# Altium PCB DC_DC.PcbDoc
Units mil, origin at the board's own origin, x right, y up, seen from the top; angles counter-clockwise.
Board outline 1775 x 1405 mil, 4 copper layers (Top Layer, Layer 1, Layer 2, Bottom Layer), stack 60.866 mil thick; 41 components, 25 nets, 139 pads, 146 vias.
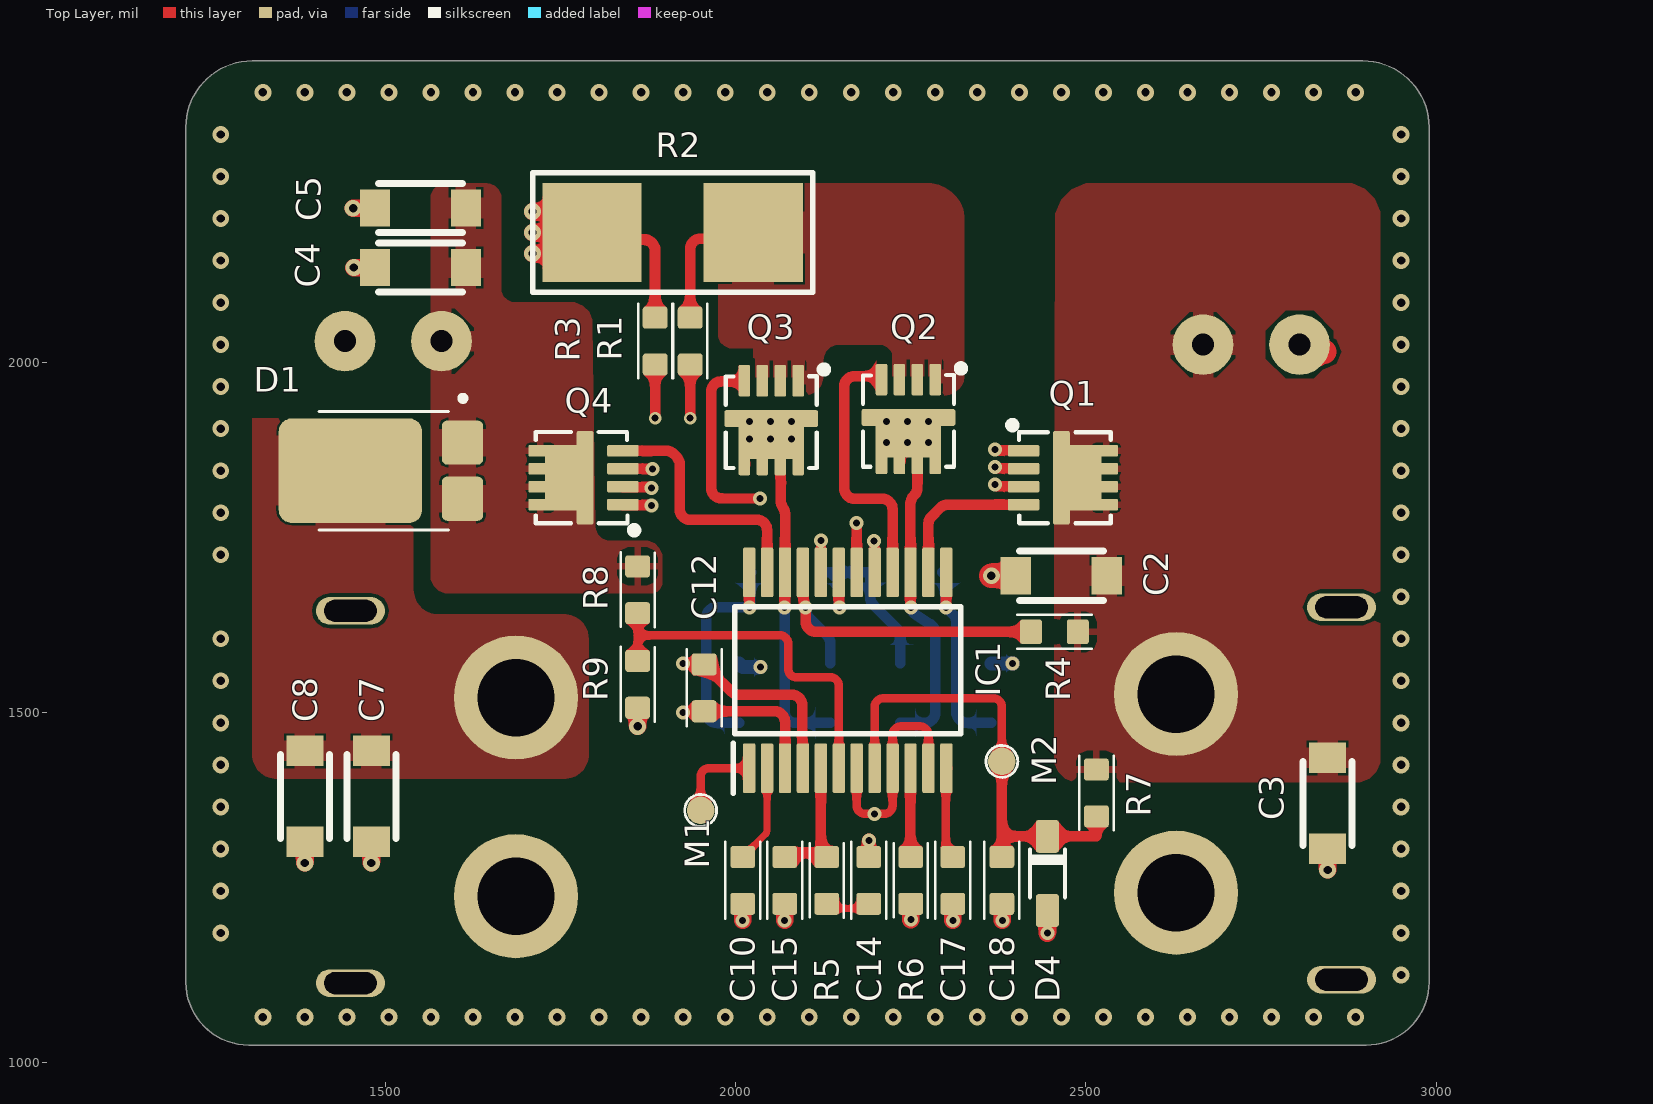
[diagram p0: Top Layer view]
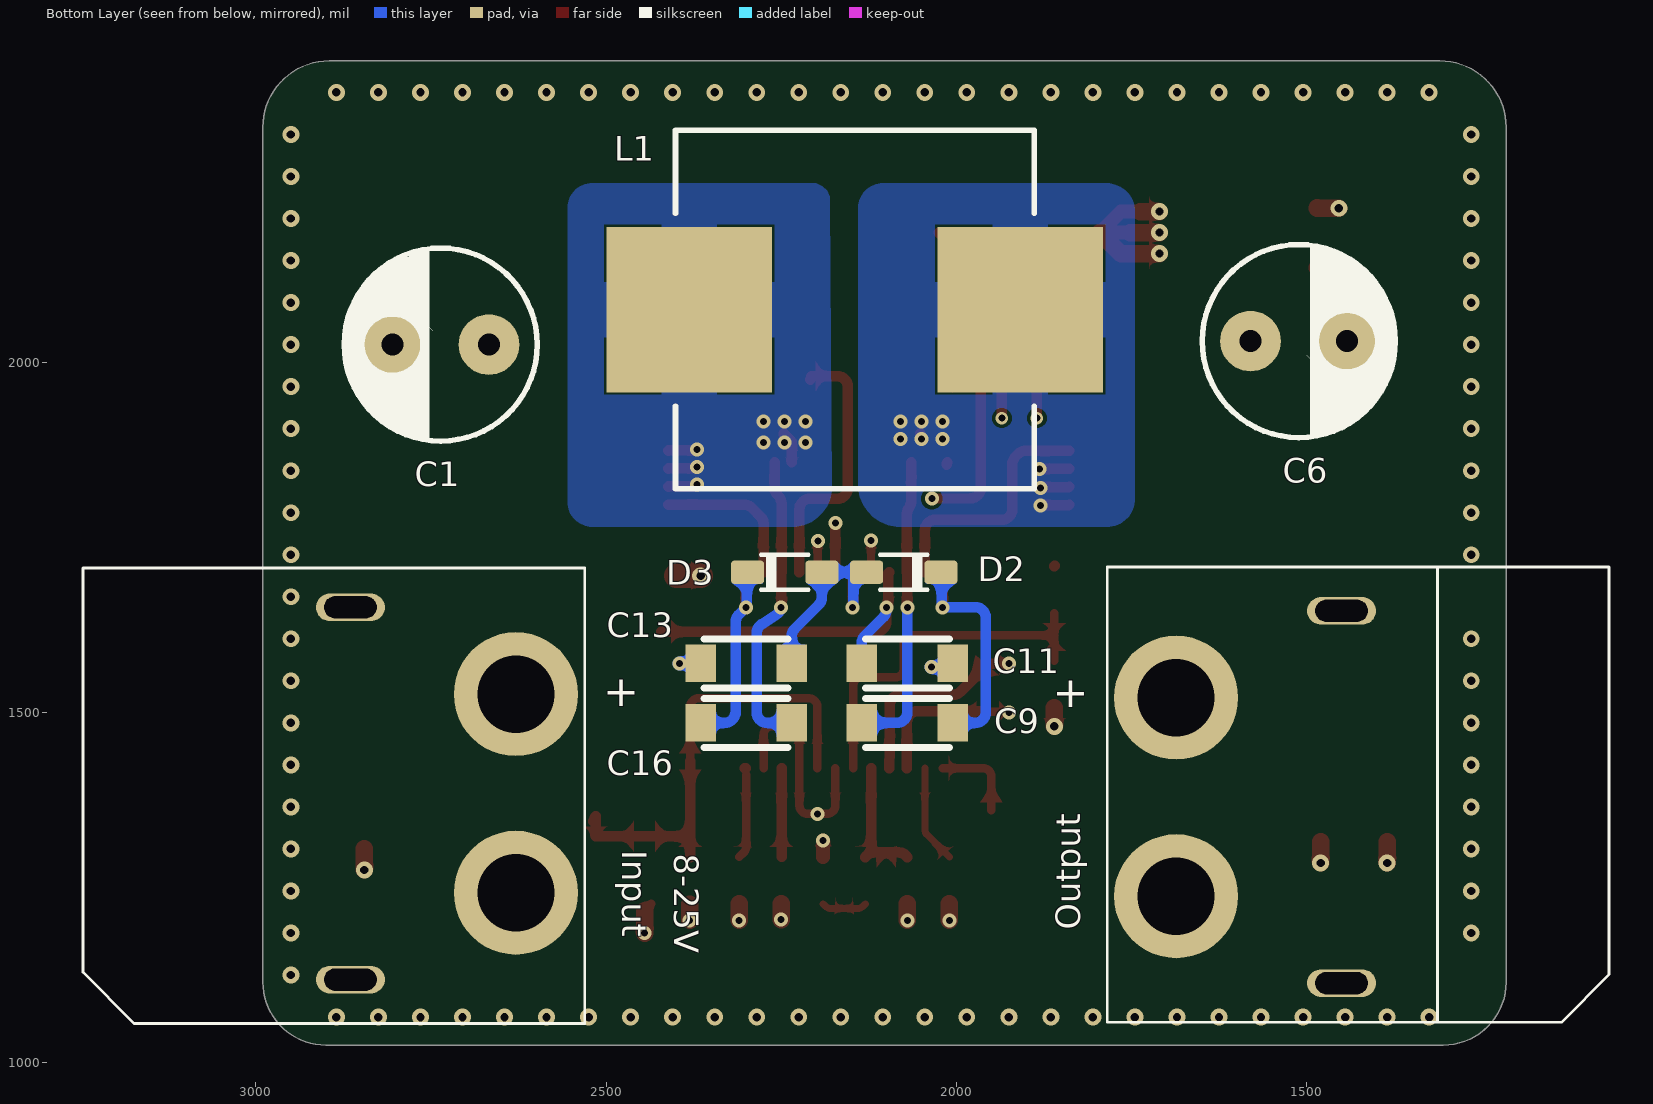
[diagram p1: Bottom Layer view, seen from below]
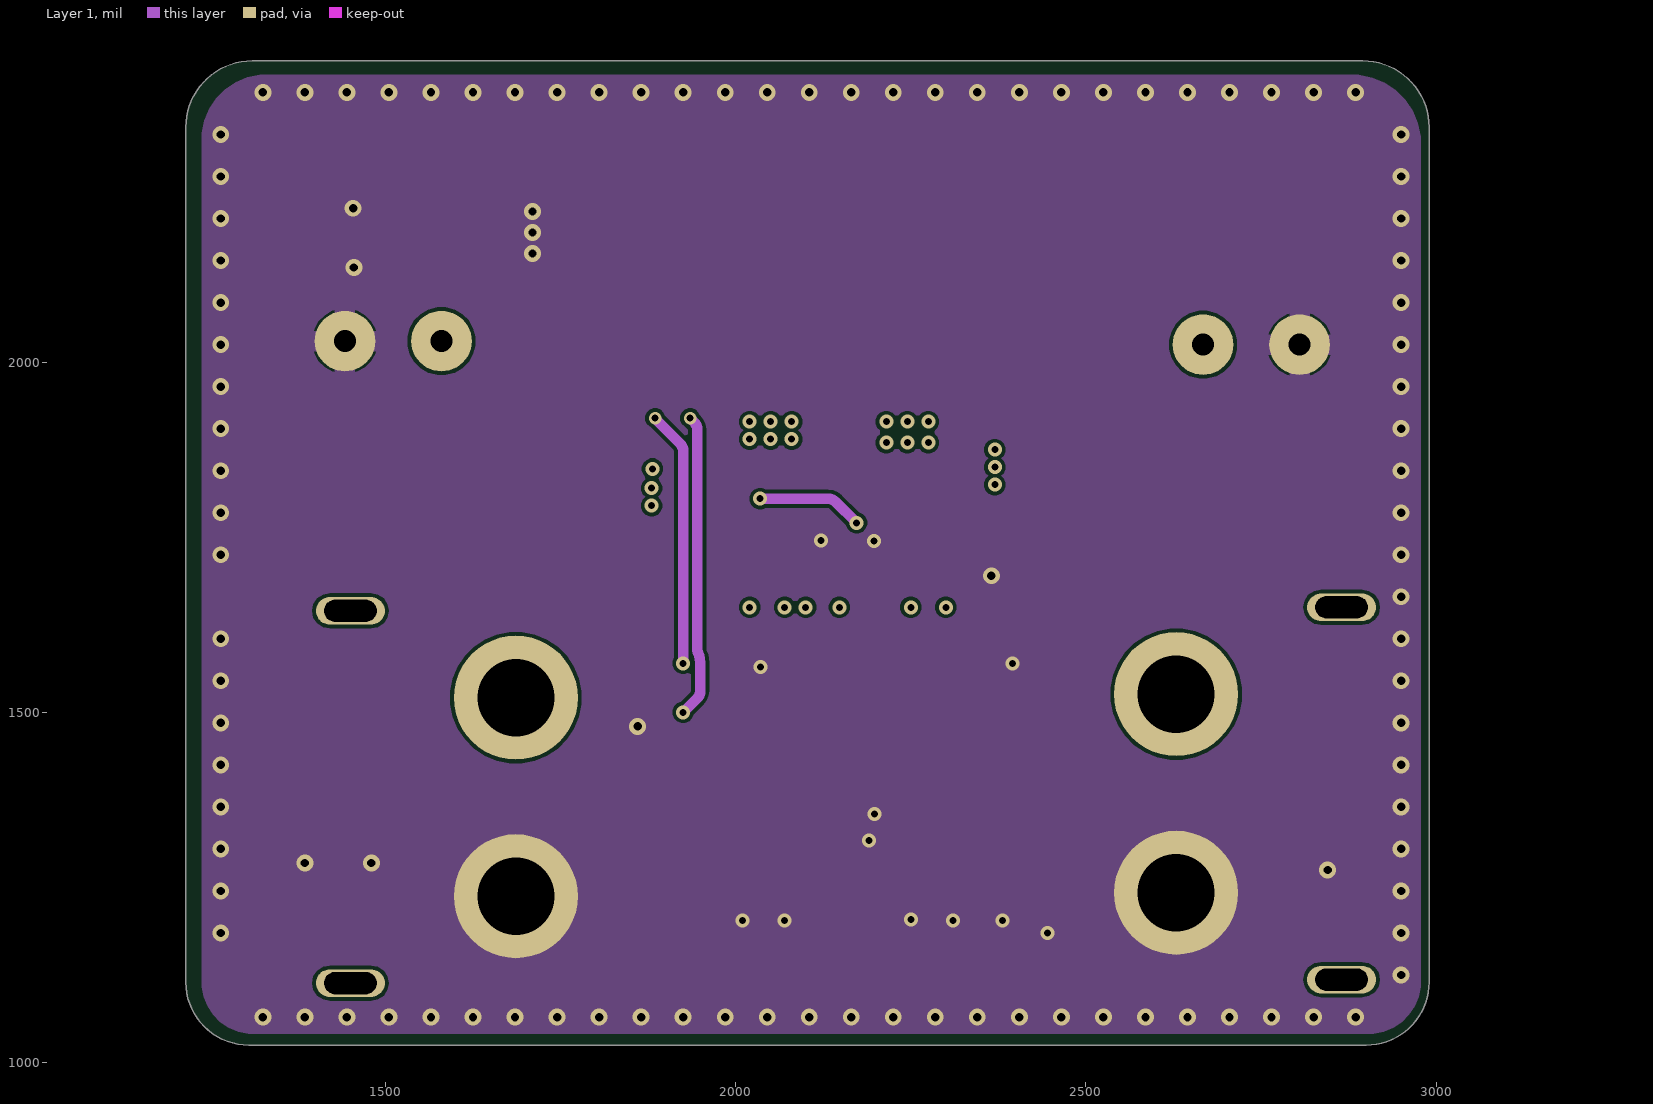
[diagram p2: Layer 1]
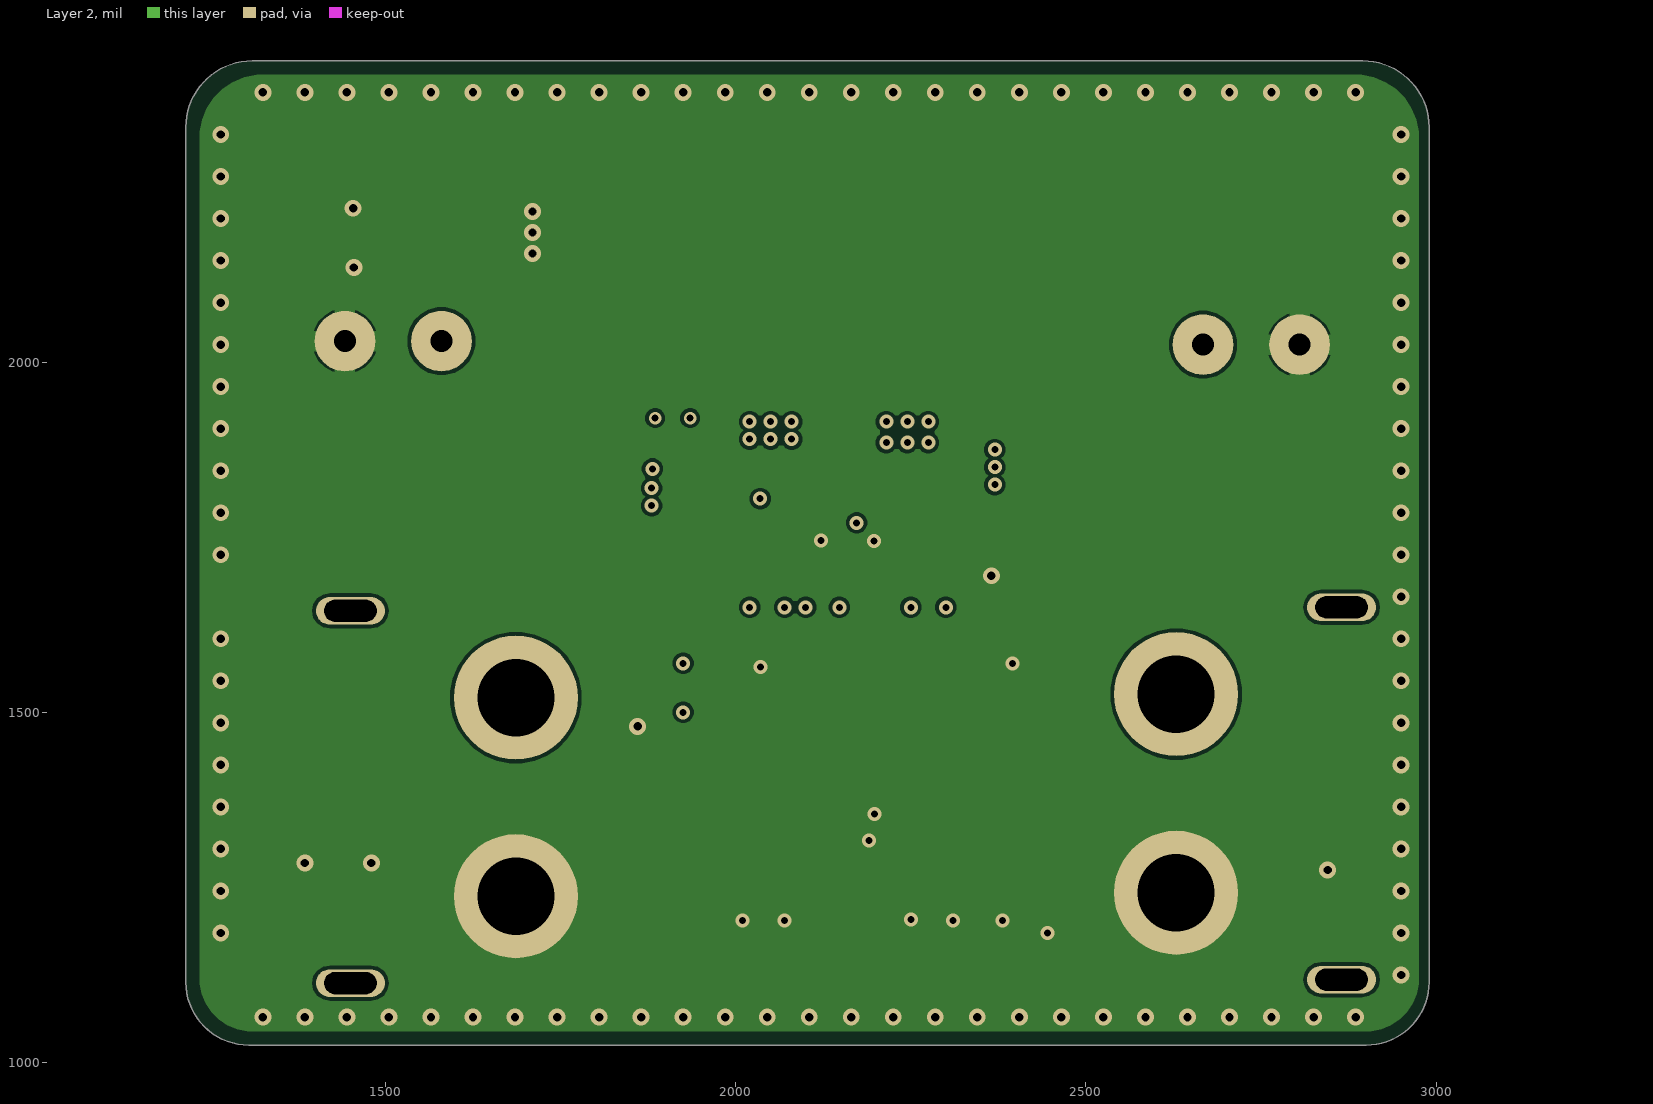
[diagram p3: Layer 2]

## Layer stack, top to bottom
Top Solder: solder mask 0.4, Solder Resist, Dk 3.7
Top Layer: signal copper 1.378
Dielectric 4: prepreg 2.7165, PP-006, Dk 4.3
Dielectric 6: prepreg 2.7165, PP-006, Dk 4.3
Layer 1: signal copper 1.378
Dielectric 1: core 44.4882, FR-4, Dk 4.6
Layer 2: signal copper 1.378
Dielectric 7: prepreg 2.7165, PP-006, Dk 4.3
Dielectric 5: prepreg 2.7165, PP-006, Dk 4.3
Bottom Layer: signal copper 1.378
Bottom Solder: solder mask 0.4, Solder Resist, Dk 3.7

## Board outline
1305,1025 2900,1025 ccw(c2900,1115) 2990,1115 2990,2335 ccw(c2895,2335) 2895,2430 1310,2430 ccw(c1310,2335) 1215,2335 1215,1115 ccw(c1305,1115)

## Design rules (kind name [scope] priority, off if disabled: settings)
Clearance [All] p1: gap=4.92 ignorepadtopadclearanceinfootprint=FALSE
HoleSize [All] p1: absolutevalues=TRUE maxlimit=200 minlimit=7.87 maxpercent=80.000 minpercent=20.000
MinimumSolderMaskSliver [All] p1: minsoldermaskwidth=3
PolygonConnect [All] p1: connectstyle=Relief reliefconductorwidth=10 reliefentries=4 polygonreliefangle="90 Angle" airgapwidth=10
RoutingVias [All] p1: holewidth=28 width=50 viastyle="Through Hole" minholewidth=28 minwidth=50 maxholewidth=28 maxwidth=50
SilkToSolderMaskClearance [IsPad] p1: minsilkscreentomaskgap=3 clearancetoexposedcopper=TRUE
SolderMaskExpansion [All] p1: expansion=2 istentingtop=FALSE
Width [All] p1: maxlimit=70 minlimit=8 preferedwidth=12
27 further rules are at their usual default settings.

## Components (designator, comment, footprint, x,y, rotation, side; value= is the part's Value field where it differs from the comment)
C1 "35PZE150M8X9" PZF8x9 2667.2,2025 r0 bottom value=150uF/35V
C2 "C1206C105K5RACTU" C1206_medium 2465,1695 r0 top value=1u
C3 "C1206C105K5RACTU" C1206_medium 2845,1370 r90 top value=1u
C4 "C1206C105K5RACTU" C1206_medium 1550,2135 r0 top value=1u
C5 "C1206C105K5RACTU" C1206_medium 1550,2220 r0 top value=1u
C6 "25PZF220M8X9" PZF8x9 1580,2030 r180 bottom value=220uF/25V
C7 "C1206C105K5RACTU" C1206_medium 1480,1380 r90 top value=1u
C8 "C1206C105K5RACTU" C1206_medium 1385,1380 r90 top value=1u
C9 "C1206C224J1RACAUTO" C1206_thin 2070,1485 r0 bottom value=220n
C10 "AC0603KRX7R9BB223" C0603 2010,1260 r90 top value="22n NP0"
C11 "GRT31C5C2A104JA12L" C1206_thin 2070,1570 r180 bottom value=100n
C12 "GCM1885C2A470JA16J" C0603 1955,1535 r270 top value="47p NP0"
C13 "GRM31CC72A475ME11L" C1206_thick 2300,1570 r0 bottom value=4.7uF
C14 "C0603X103K1RAC3316" C0603 2190,1260 r270 top value=10n
C15 "GCM1885C2A470JA16J" C0603 2070,1260 r90 top value="47p NP0"
C16 "C1206C224J1RACAUTO" C1206_thin 2300,1485 r180 bottom value=220n
C17 "C0603X103K1RAC3316" C0603 2310,1260 r270 top value=10n
C18 "GCM1885C2A470JA16J" C0603 2380,1260 r90 top value="47p NP0"
D1 "PMEG045V100EIPE-QZ" SOT1289 1490,1850 r270 top value=PMEG045V100E
D2 "NRVB0540T1G" SOD323 2075,1700 r180 bottom
D3 "NRVB0540T1G" SOD323 2245,1700 r0 bottom
D4 "PDZ3.6B,115" SOD323 2445,1270 r90 top value=3V6
IC1 "LTC3780IG#PBF" SOP65P780X200-24N 2160,1560 r90 top
Input "XT60-PCB-M" XT60-PCB-M 2628.78,1525.98 r180 bottom (schematic designator Input1)
L1 "7443551470" WE-HCI 2145,2075 r0 bottom value="4.7uH 13A"
M1 "TP" "Pad 1mm SMD" 1950,1360 r0 top
M2 "TP" "Pad 1mm SMD" 2380,1430 r0 top
Output "XT60-PCB-F" XT60-PCB-F 1686.22,1237.52 r0 bottom (schematic designator Output1)
Q1 "FDMC86102L" PowerPak1212_LFPAK33 2470,1835 r270 top
Q2 "FDMC86102L" PowerPak1212_LFPAK33 2246.6,1916 r180 top
Q3 "FDMC86102L" PowerPak1212_LFPAK33 2050.85,1914.45 r180 top
Q4 "FDMC86102L" PowerPak1212_LFPAK33 1780,1835 r90 top
R1 "CR0603-FX-10R0ELF" R0603 1935,2030 r270 top value=10R
R2 "GMR100HTBFMR033" Shunt_2512 1910,2185 r0 top value=0R033
R3 "CR0603-FX-10R0ELF" R0603 1885,2030 r270 top value=10R
R4 "CR0603-FX-10R0ELF" R0603 2455,1615 r180 top value=10R
R5 "RC0603FR-07100KL" R0603 2130,1260 r270 top value=100k
R6 "CRGP0603F10K" R0603 2250,1260 r270 top value=10K
R7 "CRGCQ0603F180K" R0603 2515,1385 r270 top value=180K
R8 "RC0603FR-07100KL" R0603 1860,1675 r270 top value=100k
R9 "CRGCQ0603F6K8" R0603 1860,1540 r270 top value=6K8

## Footprints (in the part's own frame and the unit in brackets; to place one, negate y for a bottom-side part, rotate by r counter-clockwise, add the part's x,y. Pads: shape width x height; smd on the part's side, far side on the other; paste and mask are expansions set on the pad)
C0603 [mm]
  rrect25% 0.8x0.9 smd: 1(-0.85,0) 2(0.85,0)
  silkscreen extent -1.4,-0.64 1.4,0.64, body extent -0.8,-0.4 0.8,0.4, height 0.6
C1206_medium [mm]
  rect 1.1x1.35 smd: 1(-1.65,0) 2(1.65,0)
  silkscreen extent -1.52,-0.89 1.52,0.89, body extent -1.6,-0.8 1.6,0.8, height 1.26
C1206_thick [mm]
  rect 1.1x1.35 smd: 1(-1.65,0) 2(1.65,0)
  silkscreen extent -1.52,-0.89 1.52,0.89, body extent -1.6,-0.85 1.6,0.85, height 1.77
C1206_thin [mm]
  rect 1.1x1.35 smd: 1(-1.65,0) 2(1.65,0)
  silkscreen extent -1.52,-0.89 1.52,0.89, body extent -1.7,-0.91 1.7,0.89, height 1.01
"Pad 1mm SMD" [mm]
  round 1 smd mask+0.051: 1(0,0)
  silkscreen extent -0.58,-0.58 0.58,0.58
PowerPak1212_LFPAK33 [mil]
  rrect25% 16.5x45 smd mask+2: 1(-38.4,-59) 2(-12.8,-59) 3(12.8,-59) 4(38.4,-59)
  rrect25% 16.5x34 smd mask+2: 5(-38.4,59) 5(-12.8,59) 5(12.8,59) 5(38.4,59)
  rrect25% 134x24 smd mask+2: 5(0,-5)
  rrect25% 93.31x69.29 smd mask+2: 5(0.01,17.78)
  silkscreen extent -77,-77 65,65, body extent -65,-65 65,65, height 44
PZF8x9 [mm]
  round 2.2 hole 0.8: 1(0,0) 2(3.5,0)
  silkscreen extent -1.75,-3.5 5.25,3.5, body extent -2.22,-4 5.78,4, height 9.01
R0603 [mm]
  rrect25% 0.8x0.9 smd: 1(-0.85,0) 2(0.85,0)
  silkscreen extent -1.36,-0.62 1.35,0.62, body extent -0.8,-0.4 0.8,0.4, height 0.4
Shunt_2512 [mm]
  rect 3.6x3.6 smd: 1(-2.921,0) 2(2.921,0)
  silkscreen extent -5.08,-2.16 5.08,2.16, body extent -3.09,-1.57 3.21,1.63, height 0.66
SOD323 [mil]
  rrect25% 47x33 smd paste+0 mask+2: 1(-53,0) 2(53,0)
  silkscreen extent -34,-25 34,25, body extent -53,-25 53,25, height 43
SOP65P780X200-24N [mm]
  rrect25% 1.8x0.45 smd mask+0.051: 1(-3.55,3.575) 2(-3.55,2.925) 3(-3.55,2.275) 4(-3.55,1.625) 5(-3.55,0.975) 6(-3.55,0.325) 7(-3.55,-0.325) 8(-3.55,-0.975) 9(-3.55,-1.625) 10(-3.55,-2.275) 11(-3.55,-2.925) 12(-3.55,-3.575) 13(3.55,-3.575) 14(3.55,-2.925) 15(3.55,-2.275) 16(3.55,-1.625) 17(3.55,-0.975) 18(3.55,-0.325) 19(3.55,0.325) 20(3.55,0.975) 21(3.55,1.625) 22(3.55,2.275) 23(3.55,2.925) 24(3.55,3.575)
  silkscreen extent -4.45,-4.1 2.3,4.15, body extent -3.9,-4.1 3.9,4.1, height 2
SOT1289 [mil]
  rrect25% 62.99x59.06 smd: 1(-35,120) 2(45,120)
  rrect25% 149.61x204.72 smd: 3(5,-40)
  silkscreen extent -102,-85 90,125, body extent -83,-121 93,135, height 30
WE-HCI [mm] "Würth Elektronik - Fixed Inductors"
  rect 6x6 smd: 1(-6,0) 2(6,0)
  silkscreen extent -6.5,-6.5 6.5,6.5, body extent -7.04,-6.79 6.96,6.52, height 6.55
XT60-PCB-F [mm]
  round 4.5 hole 2.8: 1(0,-7.2) 2(0,0)
  oval 2.5x1 hole 0.8 slot 1.9 at 0 deg: 3(-6,-10.35) 4(-6,3.15)
  silkscreen extent -15.7,-11.94 2.5,4.57, body extent -16.31,-11.18 2.09,4.32, height 8.11
XT60-PCB-M [mm]
  round 4.5 hole 2.8: 1(0,0) 2(0,-7.2)
  oval 2.5x1 hole 0.8 slot 1.9 at 0 deg: 3(-6,-10.35) 4(-6,3.15)
  silkscreen extent -15.7,-11.94 2.5,4.57, body extent -15.2,-11.31 3,4.19, height 8.41

## Part data
C1: library part EC_THT_157_polarised, "High temp hybrid capacitor -55/125C", Supplier Part Number 1=232-35PZE150M8X9, Category="Capacitors THT", Component Type=Capacitors, Main=Capacitors, SMD/THD=THT, Status=A, Supplier 1=Mouser, Supplier 2=Digi-Key, Supplier Part Number 2=35PZE150M8X9-ND
C2 C3 C4 C5 C7 C8: library part CC_1206_X7R_105, "Ceramic Capacitor X7R 50V", Supplier Part Number 1=81-GCJ31MR71H105KA2L, Supplier 1=Mouser, Supplier 2=Digi-Key, Supplier 3=Farnell, Supplier Part Number 2=490-5810-1-ND, Supplier Part Number 3=2781416
C6: library part EC_THT_227_polarised, "High temp hybrid capacitor -55/125C", Supplier Part Number 1=232-25PZF220M8X9, Category="Capacitors THT", Component Type=Capacitors, Main=Capacitors, SMD/THD=THT, Status=A, Supplier 1=Mouser, Supplier 2=Digi-Key, Supplier Part Number 2=25PZF220M8X9-ND
C9 C16: library part CC_1206_X7R_224, "Ceramic Capacitor X7R 100V", Supplier Part Number 1=80-C1206C224J1RAUTO, Supplier 1=Mouser, Supplier 2=Digi-Key, Supplier Part Number 2=399-C1206C224J1RACAUTOCT-ND
C10: library part CC_0603_X7R_223, "Ceramic Capacitor NP0 50V", Manufacturer Part Number="22n/50V X7R C0603", Supplier Part Number 1=603-AC603KRX7R9BB223, Category="Capacitors CERA SMD", Component Type=Capacitors, Main=Capacitors, Part Number="22n/50V X7R C0603", SMD/THD=SMD, Status=A, Supplier 1=Mouser, Supplier 2=Farnell, Supplier 3=Digi-Key, Supplier Part Number 2=3368998, Supplier Part Number 3=311-3119-6-ND
C11: library part CC_1206_NP0_104, "Ceramic Capacitor NP0 100V", Supplier Part Number 1=81-GRT31C5C2A104JA2L, Supplier 1=Mouser, Supplier 2=Digi-Key, Supplier Part Number 2=490-GRT31C5C2A104JA12LDKR-ND
C12 C15 C18: library part CC_0603_NP0_470, "Ceramic Capacitor NP0 100V", Supplier Part Number 1=81-GCM1885C2A470JA6J, Category="Capacitors CERA SMD", Component Type=Capacitors, ComponentLink1Description=datasheet, Main=Capacitors, SMD/THD=SMD, Status=A, Supplier 1=Mouser, Supplier 2=Farnell, Supplier Part Number 2=3784365
C13: library part CC_1206_X7S_475, "Ceramic Capacitor X7S 100V", Supplier Part Number 1=81-GRM31CC72A475ME11, Supplier 1=Mouser, Supplier 2=Digi-Key, Supplier Part Number 2=490-18621-6-ND
C14 C17: library part CC_0603_X7R_103, "Ceramic Capacitor X7R 100V", Part Number="10n/100V X7R C0603", Supplier Part Number 1=80-C0603X103K1R3316, Category="Capacitors CERA SMD", Component Type=Capacitors, Main=Capacitors, SMD/THD=SMD, Status=A, Supplier 1=Mouser, Supplier 2=Digi-Key, Supplier 3=Farnell, Supplier 4=TME, Supplier Part Number 2=399-C0603X103K1RAC3316CT-ND, Supplier Part Number 3=2666889, Supplier Part Number 4=C0603X103K1RAC3316
D1: library part PMEG045V100E, "Planar Low VF Schottky barrier rectifier 45V/10A", Manufacturer=NXP, Part Number=PMEG4005AEA, Supplier Part Number 1=771-PMEG4005AESFYL, Category=Schottky, ComponentLink1Description=Datasheet, ComponentLink1URL=http://www.farnell.com/datasheets/684565.pdf, Main=Diodes, SMD/THD=SMD, Status=A, Supplier 1=Mouser, Supplier 2=Digi-Key, Supplier 3=Farnell, Supplier Part Number 2=1727-2295-1-ND, Supplier Part Number 3=2498560
D2 D3: "Schottky Diode 40V, 500mA", Supplier Part Number 1=863-NRVB0540T1G, Category=Schottky, Main=Diodes, SMD/THD=SMD, Status=A, Supplier 1=Mouser, Supplier 2=Farnell, Supplier Part Number 2=2723913
D4: "Zener Diode 3.6V, 400mW", Supplier Part Number 1=771-PDZ36B8115, Category=Zener, Main=Diodes, SMD/THD=SMD, Status=A, Supplier 1=Mouser, Supplier 2=TME, Supplier Part Number 2=PDZ3.6B.115
IC1: "DC/DC Buck-Boost", Manufacturer_Name="Analog Devices", Supplier Part Number 1=584-LTC3780IG#PBF, Height=2mm, Manufacturer_Part_Number=LTC3780IG#PBF, Supplier 1=Mouser, Supplier 2=TME, Supplier Part Number 2=LTC3780IGPBF
Input Output: "XT60 Connector", Manufacturer_Name=Amass, Manufacturer_Part_Number=XT30PB, Datasheet Link=https://www.tme.eu/Document/4acc913878197f8c2e30d4b8cdc47230/XT30UPB%20SPEC.pdf, Height=10.7mm
L1: library part "WE-HCI High Current 4.7uH-13A", "WE-HCI SMT High Current Inductor 4.7uH 20% 100kHz Ferrite 13A SMD T/R  / Frequency - Self Resonant 30MHz", Supplier Part Number 1=732-7443551470CT-ND, Supplier 1=Digikey, Supplier 2=Mouser, Supplier Part Number 2=710-7443551470
M1 M2: library part TP_PCB, "Test Point", Category=Pads_Pins_Measure_Points, Component Type=Mechanical, Main=Mechanical, Stock number=--------
Q1 Q2 Q3 Q4: "Single N-Channel 100V, 18A, 23mOhm", Manufacturer="ON Semiconductor / Fairchild", Supplier Part Number 1=512-FDMC86102L, Category=N-MOS, Component Type=Transistors, ComponentLink1Description=Datasheet, ComponentLink1URL=http://www.farnell.com/datasheets/1837750.pdf, Main=Transistors, Manufacturer Part Number=FDMC86102L, Part Number=FDMC86102L, SMD/THD=SMD, Status=A, Supplier 1=Mouser, Supplier 2=Digi-Key, Supplier Part Number 2=FDMC86102LFSCT-ND
R1 R3 R4: library part CR_0603_100, "Resistor 1%, 0.1W, 75V", Supplier Part Number 1=652-CR0603FX-10R0ELF, Category="Resistors SMD", Component Type=Resistors, Main=Resistors, SMD/THD=SMD, Status=A, Supplier 1=Mouser, Supplier 2=Farnell, Supplier 3=Digi-Key, Supplier Part Number 2=2321756, Supplier Part Number 3=CR0603-FX-10R0ELFDKR-ND
R2: library part SHUNT_2512_0R033, "Current Sense Resistor 1%, 3W, AEC-Q200", Supplier Part Number 1=755-GMR100HTBFMR033, Category="Resistors SMD", Component Type=Resistors, Main=Resistors, SMD/THD=SMD, Status=A, Supplier 1=Mouser, Supplier 2=Digi-Key, Supplier 3=Farnell, Supplier Part Number 2=511-1690-1-ND, Supplier Part Number 3=2808333
R5 R8: library part CR_0603_104, "Resistor 1%, 0.1W, 75V", Supplier Part Number 1=603-RC0603FR-07100KL, Category="Resistors SMD", Component Type=Resistors, Main=Resistors, SMD/THD=SMD, Status=A, Supplier 1=Mouser, Supplier 2=Farnell, Supplier 3=TME, Supplier Part Number 2=9238727, Supplier Part Number 3=RC0603FR-07100K
R6: library part CR_0603_103, "Resistor 1%, 0.1W, 75V", Supplier Part Number 1=279-CRGP0603F10K, Category="Resistors SMD", Component Type=Resistors, Main=Resistors, SMD/THD=SMD, Status=A, Supplier 1=Mouser, Supplier 2=Digi-Key, Supplier 3=Farnell, Supplier Part Number 2=A130428CT-ND, Supplier Part Number 3=2861046
R7: library part CR_0603_184, "Resistor 1%, 0.1W, 75V", Supplier Part Number 1=279-CRGCQ0603F180K, Category="Resistors SMD", Component Type=Resistors, Main=Resistors, SMD/THD=SMD, Status=A, Supplier 1=Mouser, Supplier 2=Digi-Key, Supplier 3=Farnell, Supplier Part Number 2=A129715CT-ND, Supplier Part Number 3=2861488
R9: library part CR_0603_682, "Resistor 1%, 0.1W, 75V", Supplier Part Number 1=279-CRGCQ0603F6K8, Category="Resistors SMD", Component Type=Resistors, Main=Resistors, SMD/THD=SMD, Status=A, Supplier 1=Mouser, Supplier 2=Digi-Key, Supplier 3=Farnell, Supplier Part Number 2=A129698CT-ND, Supplier Part Number 3=2861471

## Via types
v1: diameter 24, hole 12, Top Layer to Bottom Layer, tented both sides, 102 vias
v2: diameter 20, hole 10, Top Layer to Bottom Layer, tented both sides, 40 vias
v3: diameter 24, hole 12, Top Layer to Bottom Layer, tented top, 2 vias
v4: diameter 18, hole 10, Top Layer to Bottom Layer, tented both sides, 2 vias

## Nets (pads, with @x,y where several pads share a name; then routed paths per layer and width w, separated by ;. In a path a pad name is that pad's centre, name@x,y a point inside that pad or via, vN(x,y) a via of type N, cw(c..) or ccw(c..) an arc to the next point about the centre after c; other vN are vias at no path point)
GND: C1.2 C2.1 C3.1 C4.1 C5.1 C6.2 C7.1 C8.1 C10.1 C11.2 C13.2 C14.1 C15.1 C17.2 C18.1 D4.1 IC1.7 IC1.9 IC1.11 IC1.17 IC1.20 Input.2 Output.2 R2.1 R3.1 R6.2 R9.2 | length 1375.5
  Top Layer w12: IC1.20 2121.75,1699.9 2121.75,1745.06 v2(2121.89,1745.2) ; IC1.7 2172.8,1367 ccw(c2184.8,1367) 2184.8,1355 v2(2198.41,1355) 2212.03,1355 ccw(c2211.98,1367) 2223.98,1367 IC1.9 2223.98,1468.05 cw(c2235.98,1468) 2235.93,1480 2263.16,1480 cw(c2263.16,1468) 2275.16,1468.05 IC1.11 ; v2(2197.81,1744.63) 2198.1,1744.34 2198.1,1700.05 IC1.17 ; D4.1@2435.46,1226.54 D4.1
  Top Layer w15: v2@2187.8,1317 v2(2190,1317)
  Top Layer w16: R2.1 1805,2175 1869,2175 cw(c1869,2159) 1885,2159.06 R3.1
  Top Layer w20: R2.1@1737.5,2215 1765,2215 R2.1 R2.1@1752.5,2185 ; C14.1 v2(2190,1317)
  Top Layer w25: v3(1385,1285) C8.1 ; v1(1453.8,2219.61) 1484.65,2219.61 C5.1 ; v1(1455,2135) C4.1 ; v3(1480,1285) C7.1 ; v1(1710,2155) 1765,2155 R2.1 ; v1(1710,2185) R2.1@1752.5,2185 ; v1(1710,2215) R2.1@1737.5,2215 ; v1(1860,1480) R9.2 ; v2(2010,1203) C10.1 ; v2(2070,1203) C15.1 ; v2(2250,1204) R6.2 ; v2(2310,1203) C17.2 ; C18.1@2380.3,1226.24 2380.59,1225.94 v2(2380.59,1203) ; v2(2445,1185) D4.1 ; v1(2845,1275) C3.1
  Top Layer w35: v1(2365,1695.1) 2399.94,1695.1 C2.1 ; C1.2@2831.03,2010.89 2835.18,2015.04 C1.2@2840.1,2015.04
  Bottom Layer w20: C11.2 2010.64,1564.4 v2(2035.42,1564.4) ; C13.2 v2(2395,1570)
  other v1: 1325,1065 1385,1065 1445,1065 1505,1065 1565,1065 1625,1065 1685,1065 1745,1065 1805,1065 1865,1065 1925,1065 1985,1065 2045,1065 2105,1065 2165,1065 2225,1065 2285,1065 2345,1065 2405,1065 2465,1065 2525,1065 2585,1065 2645,1065 2705,1065 2765,1065 2825,1065 2885,1065 2950,1125 1265,1185 2950,1185 1265,1245 2950,1245 1265,1305 2950,1305 1265,1365 2950,1365 1265,1425 2950,1425 1265,1485 2950,1485 1265,1545 2950,1545 1265,1605 2950,1605 2950,1665 1265,1725 2950,1725 1265,1785 2950,1785 1265,1845 2950,1845 1265,1905 2950,1905 1265,1965 2950,1965 1265,2025 2950,2025 1265,2085 2950,2085 1265,2145 2950,2145 1265,2205 2950,2205 1265,2265 2950,2265 1265,2325 2950,2325 1325,2385 1385,2385 1445,2385 1505,2385 1565,2385 1625,2385 1685,2385 1745,2385 1805,2385 1865,2385 1925,2385 1985,2385 2045,2385 2105,2385 2165,2385 2225,2385 2285,2385 2345,2385 2405,2385 2465,2385 2525,2385 2585,2385 2645,2385 2705,2385 2765,2385 2825,2385 2885,2385
NetC1_1: C1.1 C2.2 C3.2 Input.1 Q1.5 R4.1 R7.1 | length 18.3
  Bottom Layer w15: Input.1@2613.55,1535 cw(c2613.55,1520) 2624.16,1530.61 Input.1
NetC4_2: C4.2 C5.2 C6.1 D1.1 D1.2 Q4.5 R8.1 | length 1.1
  Top Layer w15: R8.1@1859.23,1709.23 R8.1
NetC7_2: C7.2 C8.2 D1.3 Output.1
NetC9_1: C9.1 D2.2 IC1.24 | length 362.2
  Top Layer w15: IC1.24 2019.63,1699.39 2019.63,1650.37 v2(2020,1650)
  Bottom Layer w15: C9.1 1972.92,1485 cw(c1972.92,1500) 1957.92,1500 1957.92,1635 cw(c1972.92,1635) 1972.92,1650 v2(2020,1650) 2020.96,1650.96 2020.96,1698.96 D2.2
NetC9_2: C9.2 IC1.22 L1.1 Q3.5 Q4.1 Q4.2 Q4.3 | length 569.5
  Top Layer w15: Q4.1 1839.75,1795.85 1879.15,1795.85 v2(1880,1795) ; Q4.2 1839.75,1821.45 1877.2,1821.45 1878.65,1820 v2(1880,1820) ; Q4.3 1839.12,1847.68 1881.05,1847.68 v2(1881.16,1847.57) ; Q3.5@2013.2,1857 2013.5,1855.69 Q3.5@2013.95,1853.78 ; v2(2050,1890) 2051.28,1896.59 Q3.5@2051.59,1898.22 ; Q3.5@2064.4,1857 2064.4,1801.81 ccw(c2079.4,1801.81) 2066.44,1794.27 2068.4,1790.9 cw(c2055.43,1783.35) 2070.43,1783.35 IC1.22 2070.22,1699.55 2070.22,1650.22 v2(2070,1650)
  Bottom Layer w15: v2(2070,1650) 2070,1500 ccw(c2085,1500) 2085,1485 C9.2
  other v2: 2020,1890 2080,1890 2020,1915 2050,1915 2080,1915
NetC10_2: C10.2 IC1.2 | length 140.8
  Top Layer w10: C10.2 2020.94,1304.21 cw(c2029,1298.44) 2021.97,1305.43 2041.95,1325.41 ccw(c2034.84,1332.45) 2044.84,1332.45 IC1.2
NetC11_1: C11.1 IC1.21 R4.2 | length 495.6
  Top Layer w15: IC1.21@2095.51,1700.28 IC1.21 2097.38,1698.41 2097.38,1653.97 2100,1651.35 2100,1630 ccw(c2115,1630) 2115,1615 R4.2
  Bottom Layer w15: v2(2100,1650) 2100,1646.21 ccw(c2115,1646.21) 2104.38,1635.62 2130.83,1609.17 cw(c2120.2,1598.58) 2135.2,1598.64 2135.2,1598.58 2135.2,1570.24 C11.1
NetC12_1: C12.1 IC1.4 R3.2 | length 728.6
  Top Layer w15: v4(1885,1920) R3.2 ; v2(1925,1570) 1925.77,1569.23 1954.23,1569.23 C12.1 1956.97,1568.46 1965.22,1560.22 1965.22,1558.25 1994.07,1529.39 1994.12,1529.35 ccw(c2004.68,1540) 2004.68,1525 2080,1525 cw(c2080,1510) 2095,1510 2095,1448.17 IC1.4
  Layer 1 w15: v4(1885,1920) 1885,1919.19 1920.61,1883.58 cw(c1910,1872.97) 1925,1872.97 v2@1925,1571.35
NetC12_2: C12.2 IC1.3 R1.2 | length 731.1
  Top Layer w12: v2(1925,1500) 1925.77,1500.77 1954.23,1500.77 C12.2
  Top Layer w15: v4(1935,1920) R1.2 ; C12.2 2055.43,1501.54 cw(c2055.43,1486.54) 2070.43,1486.54 IC1.3
  Layer 1 w15: v2(1925,1500) 1945,1520 ccw(c1934.39,1530.61) 1949.39,1530.61 1949.39,1571.67 ccw(c1919.16,1571.56) 1946.44,1584.61 cw(c1960,1591.01) 1945,1590.96 1945,1903.79 ccw(c1930,1903.79) 1940.61,1914.39 v4(1935,1920)
NetC13_1: C13.1 D2.1 D3.1 IC1.19 | length 316.1
  Top Layer w15: IC1.19 2147.62,1699.35 2147.62,1650.37 v2(2148.04,1649.95)
  Bottom Layer w15: D2.1 D2.1@2135,1700 ; v2(2148.04,1649.95) 2147.08,1650.91 2147.08,1687.92 D2.1@2135,1700 ; C13.1 2235.04,1608.75 ccw(c2220.04,1608.75) 2230.66,1619.34 2196.38,1653.62 cw(c2207,1664.21) 2192,1664.21 D3.1 D2.1@2135,1700
NetC14_2: C14.2 R5.2 | length 64.6
  Top Layer w10: R5.2 2133.61,1222.93 ccw(c2140.68,1230) 2140.68,1220 2179.32,1220 ccw(c2179.32,1230) 2186.39,1222.93 C14.2
NetC15_2: C15.2 IC1.5 R5.1 | length 193.7
  Top Layer w15: C15.2 2072.14,1295.61 cw(c2082.75,1285) 2082.75,1300 2117.25,1300 cw(c2117.25,1285) 2127.86,1295.61 R5.1 2126.01,1297.46 2125.96,1297.5 cw(c2136.61,1308.06) 2121.61,1308.06 IC1.5
NetC16_1: C16.1 D3.2 IC1.13 | length 321.8
  Top Layer w15: v2(2300,1650) 2300.37,1650.37 2300.37,1699.39 IC1.13 IC1.13@2300.98,1700
  Bottom Layer w15: D3.2@2298.98,1704.02 2294.96,1700 2299.04,1695.91 2299.04,1650.96 v2(2300,1650) 2310.61,1639.39 cw(c2300,1628.79) 2315,1628.79 2315,1521.51 2315,1501.05 ccw(c2331.07,1501.07) 2331.05,1485 2350.81,1485 C16.1
NetC16_2: C16.2 IC1.15 L1.2 Q1.1 Q1.2 Q1.3 Q2.5 | length 619.7
  Top Layer w15: Q2.5@2235,1857 2235,1886.63 2246.59,1898.22 v2(2245,1885) ; v2(2250,1650) 2249.78,1650.22 2249.78,1699.55 IC1.15 2249.57,1798.35 cw(c2264.57,1798.35) 2253.95,1808.95 2255.01,1810.01 ccw(c2244.4,1820.61) 2259.4,1820.61 Q2.5@2259.4,1857 ; v2(2370,1825) 2371.35,1825 2373.4,1822.95 2410.25,1822.95 Q1.3 ; v2(2370,1850) 2371.35,1850 2372.8,1848.55 2410.25,1848.55 Q1.2 ; v2(2370,1875) 2370.85,1874.15 2410.25,1874.15 Q1.1
  Bottom Layer w15: C16.2 2270,1485 ccw(c2270,1500) 2285,1500 2285,1612.95 ccw(c2270,1612.95) 2278.2,1625.51 2257.17,1639.24 cw(c2265.37,1651.8) 2251.38,1646.38 v2(2250,1650)
  other v2: 2215,1885 2275,1885 2215,1915 2245,1915 2275,1915
NetC17_1: C17.1 IC1.12 | length 122.2
  Top Layer w12: IC1.12@2300,1410.7 2300,1308.44 ccw(c2312,1308.44) 2303.51,1299.95 C17.1
  Top Layer w15: IC1.12 IC1.12@2302.11,1420.32
NetC18_2: C18.2 D4.2 IC1.8 M2.1 R7.2 | length 669
  Top Layer w12: IC1.8 2198.39,1508.05 cw(c2210.39,1508) 2210.34,1520 2368,1520 cw(c2368,1508) 2380,1508 M2.1
  Top Layer w15: C18.2 2380,1323 ; M2.1 2380,1323 ; R7.2@2518,1344.31 R7.2 2515,1344.31 2515,1323 D4.2 2380,1323
NetIC1_1: IC1.1 M1.1 | length 124.3
  Top Layer w12: M1.1 1950,1408.29 cw(c1962,1408.24) 1961.95,1420.24 IC1.1
NetIC1_6: IC1.6 R8.2 R9.1 | length 529.6
  Top Layer w12: R9.1 1860,1610 ; R8.2 1860,1610 ; IC1.6 2147.2,1538 ccw(c2135.2,1538) 2135.2,1550 2086.95,1550 cw(c2087,1562) 2075,1561.95 2075,1598.05 ccw(c2063,1598) 2063,1610 1860,1610
NetIC1_10: IC1.10 R6.1 | length 127
  Top Layer w10: R6.1@2249.57,1293.9 R6.1
  Top Layer w15: R6.1@2249.57,1293.9 IC1.10
NetIC1_14: IC1.14 Q1.4 | length 218.8
  Top Layer w15: IC1.14 2275.16,1769 cw(c2290.16,1768.94) 2279.51,1779.51 2292.21,1792.21 cw(c2302.81,1781.6) 2302.81,1796.6 Q1.4
NetIC1_16: IC1.16 Q2.4 | length 387.4
  Top Layer w15: Q2.4 2207.45,1980 2170,1980 ccw(c2170,1965) 2155,1965 2155,1820 ccw(c2170,1820) 2170,1805 2208.98,1805 cw(c2208.98,1790) 2223.98,1790 IC1.16
NetIC1_18: IC1.18 Q3.4 | length 496.2
  Top Layer w15: Q3.4@2013.2,1975 2012.45,1972.45 1980,1972.45 ccw(c1980,1957.45) 1965,1957.45 1965,1820.51 ccw(c1980,1820.51) 1969.39,1809.9 ccw(c1980,1820.51) 1979.91,1805.51 v2(2035,1805) ; v2(2172.64,1770.45) 2172.8,1770.29 IC1.18
  Layer 1 w15: v2(2035,1805) 2131.87,1805 cw(c2131.87,1790) 2142.48,1800.61 v2(2172.64,1770.45)
NetIC1_23: IC1.23 Q4.4 | length 357.7
  Top Layer w15: Q4.4 1900.73,1873.4 cw(c1900.73,1858.4) 1911.33,1869.01 1915.61,1864.74 cw(c1905,1854.13) 1920,1854.13 1920,1790.02 ccw(c1935,1790) 1934.95,1775 1935,1775 2029.84,1775 cw(c2029.84,1760) 2044.84,1760 IC1.23
"NetQ2_1, 2, 3": Q2.1 Q2.2 Q2.3 Q3.1 Q3.2 Q3.3 R1.1 R2.2 | length 200
  Top Layer w15: R1.1 1935,2161.21 cw(c1950,2161.21) 1950,2176.21 2016.21,2176.21 R2.2
pads on no net: Input.3 Input.4 Output.3 Output.4

## Polygon pours and split planes (outlines as drawn)
"NetQ2_1, 2, 3" on Top Layer " " (solid, pour order 11): 2125,2001.95 2125,1980 cw(c2097.27,1979.99) 2097.26,1952.26 2024.86,1952.26 2024.86,2020 1995,2020 cw(c1995,2040) 1975,2040 1975,2255 2029.07,2255 2275,2255 cw(c2275.02,2203.5) 2326.52,2203.48 2326.52,2051.96 2326.52,1981.52 cw(c2297.29,1981.49) 2297.26,1952.26 2225.66,1952.26 2225.66,2004.34 ccw(c2205,2004.34) 2205,2025 2148.04,2025 ccw(c2148.02,2001.98)
NetC1_1 on Top Layer "NETC1_1_L01_P006" (solid, pour order 6): 2920,1435 2920,2205 ccw(c2870,2205) 2870,2255 2510.09,2255 ccw(c2510.08,2201.24) 2456.33,2201.4 2455,1744.06 2455,1435 ccw(c2489.99,1434.99) 2490,1400 2885,1400 ccw(c2885,1435)
NetC4_2 on Top Layer "NETC4_2_L01_P005" (solid, pour order 5): 1894.98,1685.53 1895,1720 ccw(c1870.02,1720) 1870,1745 1820,1745 cw(c1819.99,1765.25) 1799.73,1765.27 1795.55,2054.6 ccw(c1764.3,2054.15) 1764.29,2085.41 1684.59,2085.41 cw(c1684.59,2105) 1665,2105 1665,2235 ccw(c1645,2235) 1645,2255 1585,2255 ccw(c1585,2235) 1565,2235 1565,1695 ccw(c1590,1695) 1590,1670 1879.45,1670 ccw(c1879.45,1685.53)
NetC7_2 on Top Layer "NONET_L-01_P-001" (solid, pour order 12): 1540,1920 1540,1675 ccw(c1575,1675) 1575,1640 1755,1640 cw(c1755,1605) 1790,1605 1790,1440 cw(c1755,1440) 1755,1405 1345,1405 cw(c1345,1440) 1310,1440 1310,1920
NetC16_2 on Bottom Layer "NETC16_2_L04_P003" (solid, pour order 3): 2205.1,2254.99 2520,2255 cw(c2520,2220) 2555,2220 2555,1800.52 cw(c2519.48,1800.51) 2519.48,1765 2233.81,1765 cw(c2233.81,1820.67) 2178.14,1821.04 2180.87,2230.93 cw(c2205.09,2230.77)
NetC9_2 on Bottom Layer "NETC9_2_L04_P002" (solid, pour order 2): 1785,2255 2105,2255 cw(c2105,2220) 2140,2220 2140,1825 cw(c2080.01,1824.99) 2080,1765 1785,1765 cw(c1785,1805) 1745,1805 1745,2215 cw(c1785,2215)
GND on Layer 2 "GND_L03_P000" (solid, pour order 0): 1325,2410 2885,2410 cw(c2885,2320) 2975,2320 2975,1120 cw(c2900,1120) 2900,1045 1310,1045 cw(c1310,1120) 1235,1120 1235,2320 cw(c1325,2320)
GND on Layer 1 "GND_L02_P004" (solid, pour order 4): 1330,2410 2880,2410 cw(c2880,2312.34) 2977.66,2312.34 2977.66,1115.25 cw(c2903.6,1115.24) 2903.6,1041.18 1311.73,1041.18 cw(c1311.72,1115.24) 1237.66,1115.25 1237.66,2317.66 cw(c1330,2317.66)

## Silkscreen, mask and mechanical layers (free items; w line width, h text height)
Bottom Overlay:
  text "8-25V" at 2403,1298 h35 r90
Bottom Solder:
  text "m6r3k @2025" at 1628,2287 h35

## Text inside footprints (layer, text, board x,y; h text height)
Input: Bottom Overlay "+" at 2503.78,1508.49 h45
Output: Bottom Overlay "+" at 1811.22,1545.02 h45 r180